# Altium PCB Main Board.PcbDoc
Units mil, origin at the board's own origin, x right, y up, seen from the top; angles counter-clockwise.
Board outline 6000 x 4000 mil, 2 copper layers (Top Layer, Bottom Layer); 13 components, 15 nets, 119 pads, 0 vias.
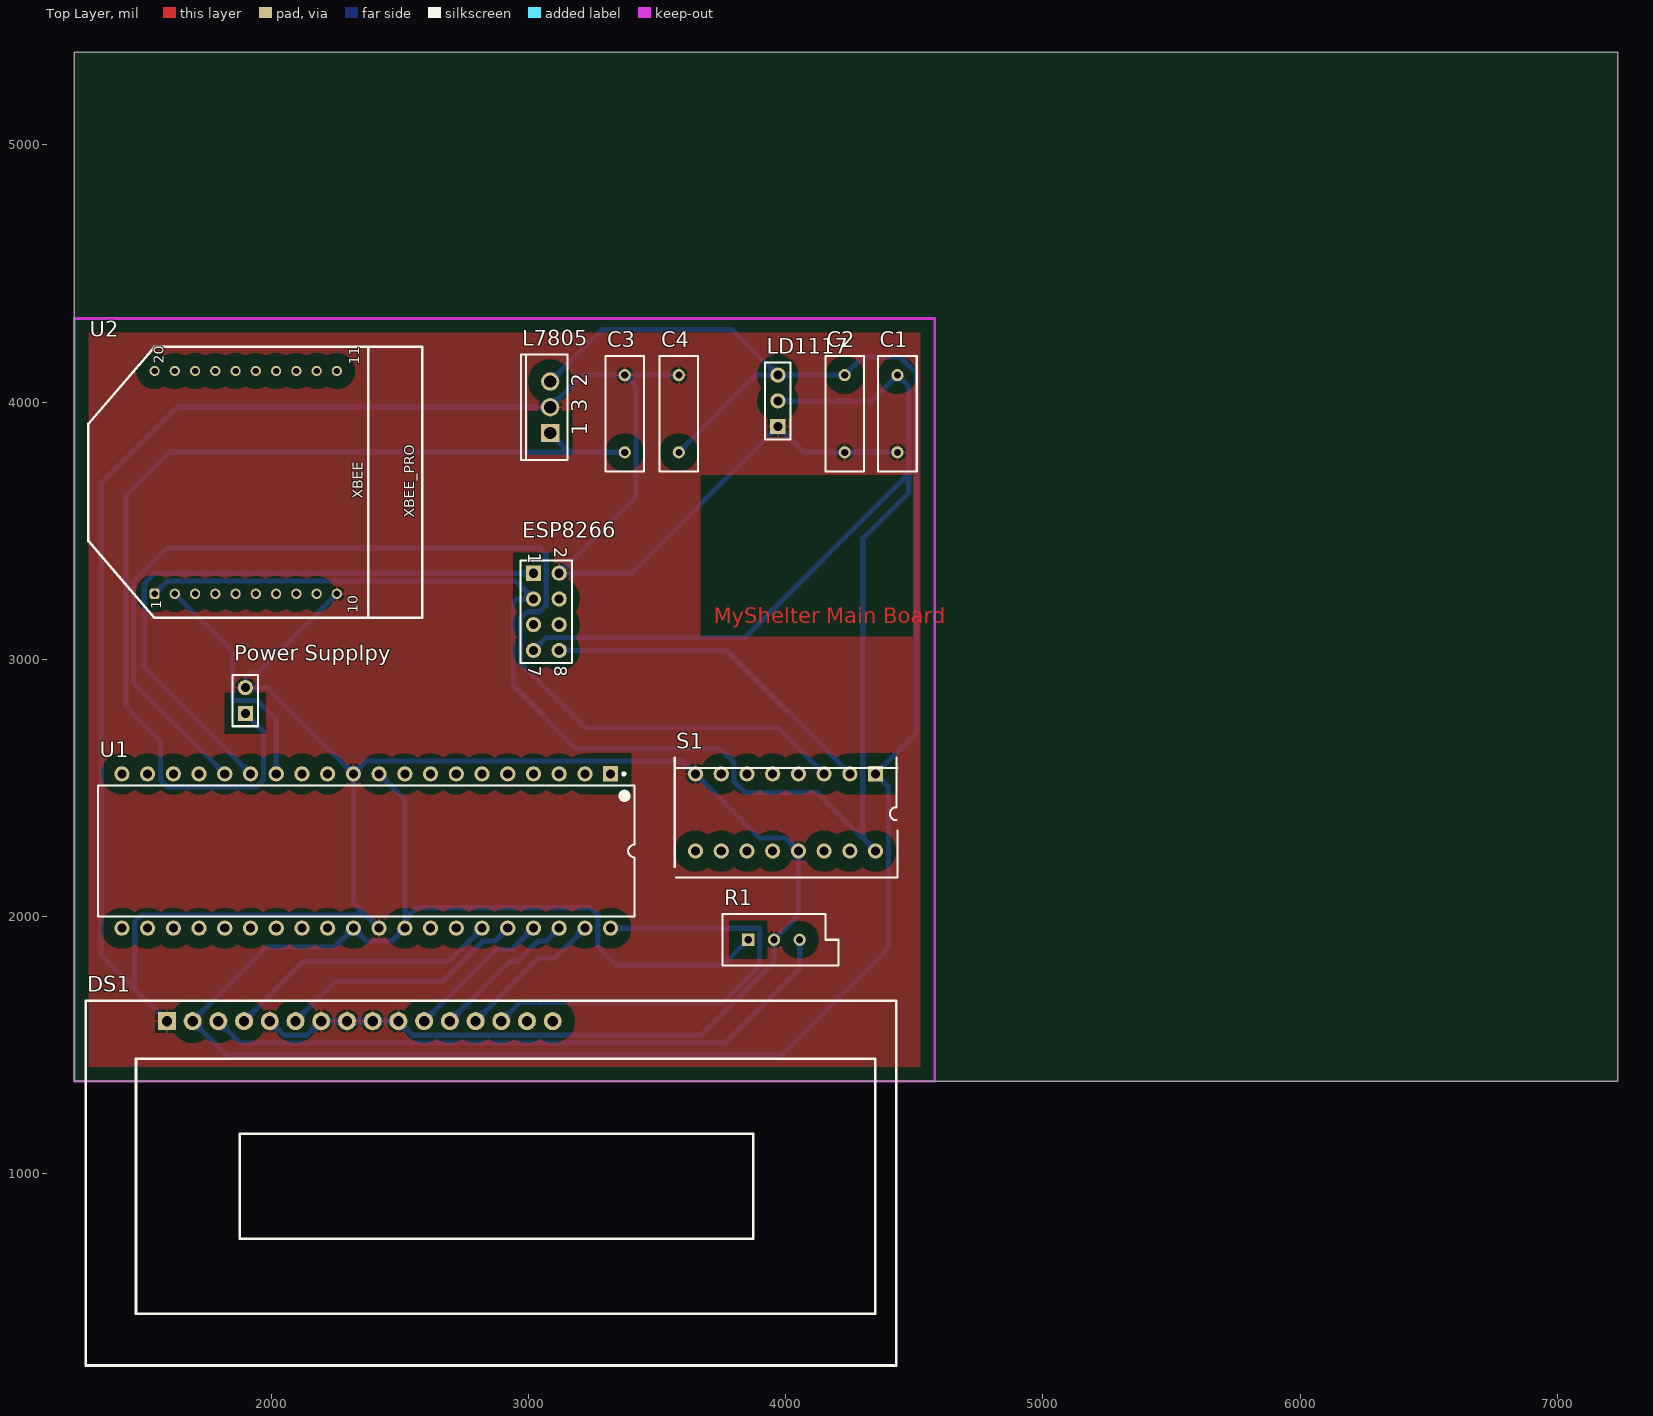
[diagram p0: Top Layer view]
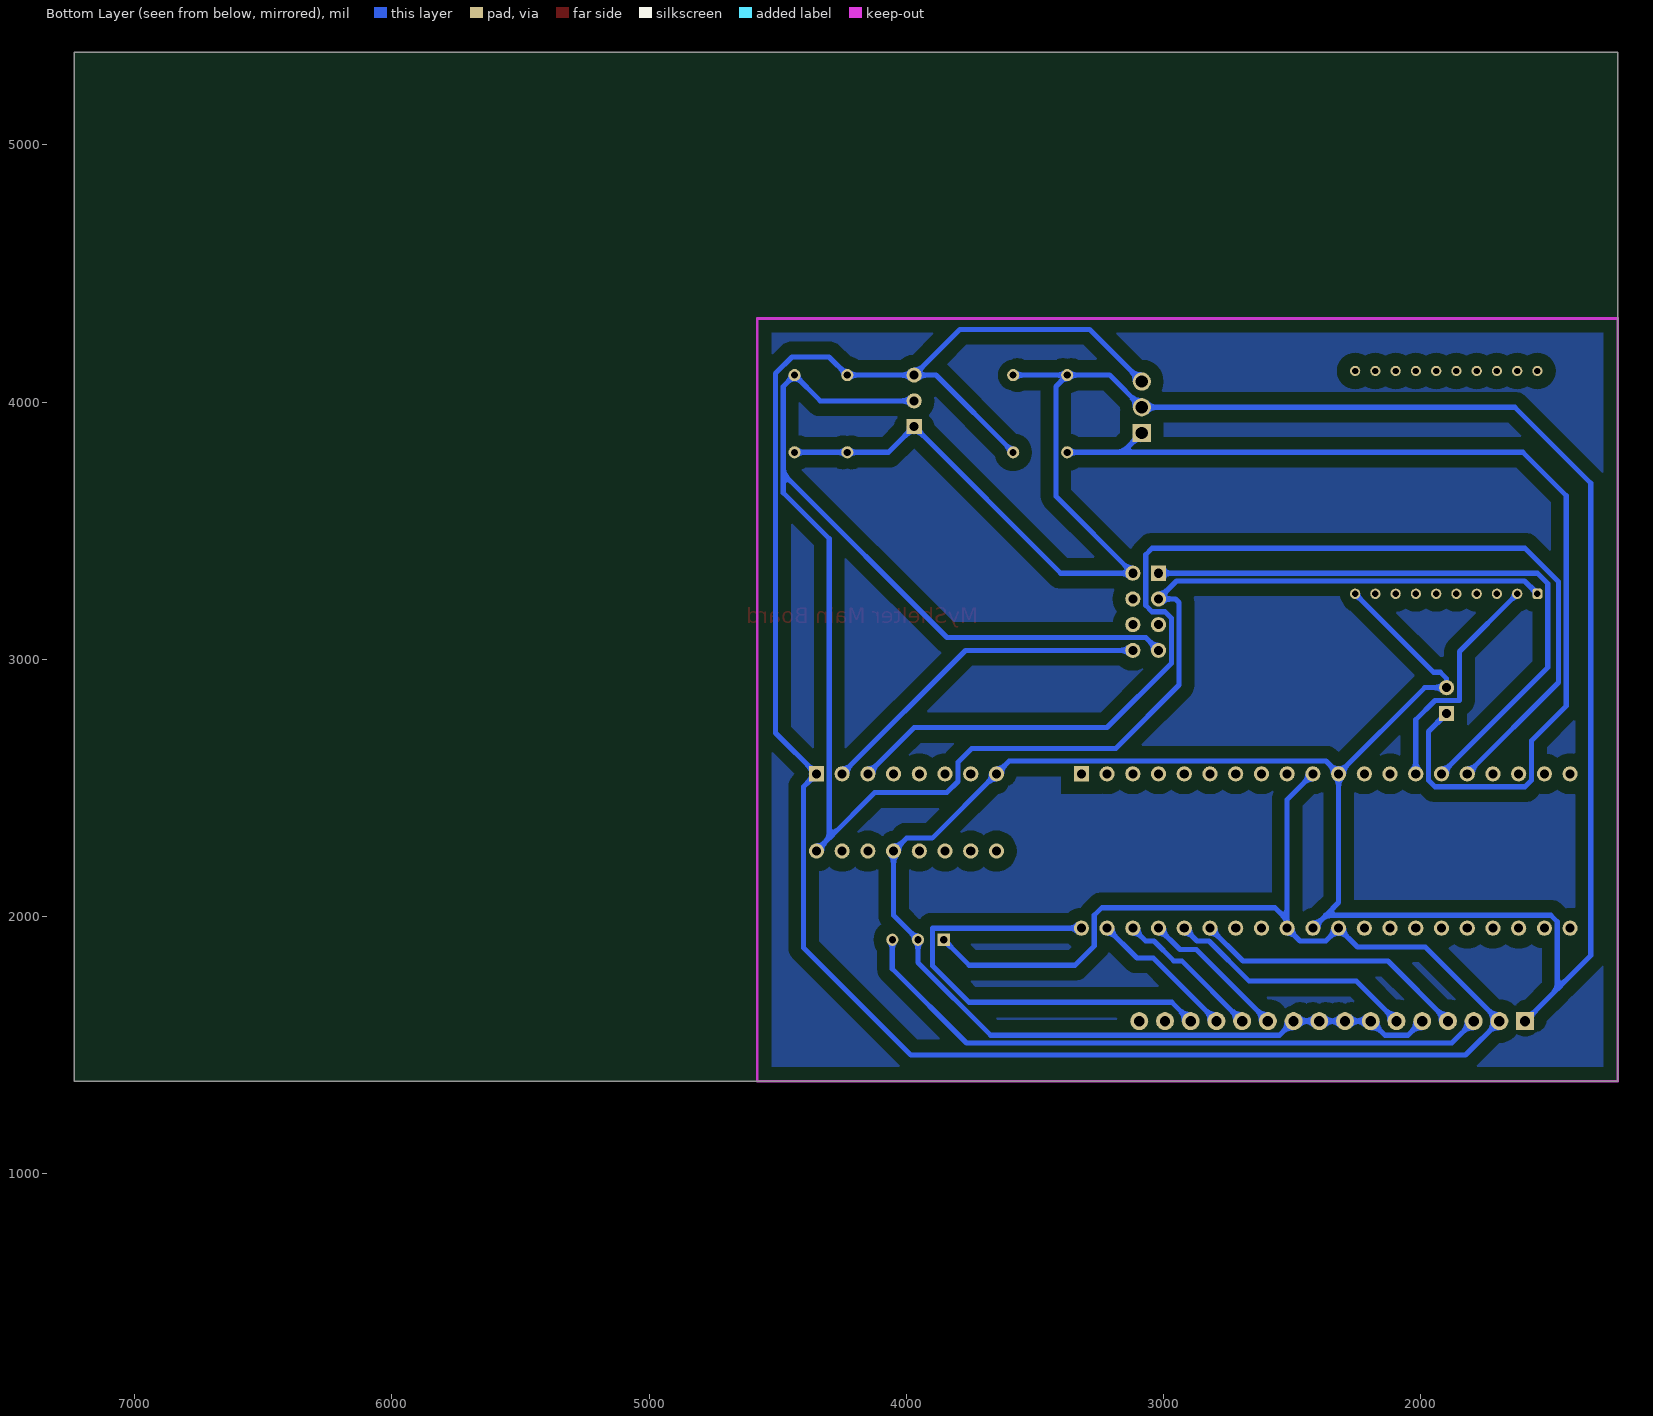
[diagram p1: Bottom Layer view, seen from below]

## Layer stack, top to bottom
Top Solder: solder mask 0.4, Solder Resist, Dk 3.5
Top Layer: signal copper 1.4
Dielectric 1: dielectric 12.6, FR-4, Dk 4.8
Bottom Layer: signal copper 1.4
Bottom Solder: solder mask 0.4, Solder Resist, Dk 3.5

## Board outline
1235,1360 7235,1360 7235,5360 1235,5360

## Design rules (kind name [scope] priority, off if disabled: settings)
Clearance "PolyGon Pour Clearance" [InPolyGon] p1: gap=50
Clearance [All] p2: gap=10
PolygonConnect [All] p1: connectstyle=Relief reliefconductorwidth=10 reliefentries=4 polygonreliefangle="90 Angle" airgapwidth=10
RoutingLayers [All] p1: top layer_v5=FALSE bottom layer_v5=TRUE
RoutingVias [All] p1: holewidth=28 width=50 viastyle="Through Hole" minholewidth=28 minwidth=50 maxholewidth=28 maxwidth=50
SolderMaskExpansion [All] p1: expansion=4
Width [All] p1: maxlimit=20 minlimit=20 preferedwidth=20
29 further rules are at their usual default settings.

## Components (designator, comment, footprint, x,y, rotation, side; value= is the part's Value field where it differs from the comment)
C1 "Cap" RAD-0.3 4435,3955 r90 top
C2 "Cap" RAD-0.3 4230,3955 r270 top
C3 "Cap" RAD-0.3 3375,3955 r270 top
C4 "Cap" RAD-0.3 3585,3955 r270 top
DS1 "LCD 44780" "OLED 16x2" 1595,1593.58 r0 top
ESP8266 "Header 4X2" HDR2X4 3025,3295 r270 top
L7805 "L7805CP" ISOWATT220AB 3085,3980 r90 top
LD1117 "Header 3" HDR1X3 3970,3905 r90 top
"Power Supplpy" "Header 2" HDR1X2 1900,2790 r90 top
R1 "RPot" VR5 3955,1910 r0 top
S1 "ESP8266" DIP-16-KEY 4350,2555 r180 top
U1 "ATmega644PA-PU" 40P6 2370,2255 r270 top
U2 "XBEE" XBEE/PRO 1115,3220 r90 top

## Footprints (in the part's own frame and the unit in brackets; to place one, negate y for a bottom-side part, rotate by r counter-clockwise, add the part's x,y. Pads: shape width x height; smd on the part's side, far side on the other; paste and mask are expansions set on the pad)
40P6 [mm] "40-Pin Ceramic Dual In-Line Package (CerDIP)"
  rect 1.5x1.5 hole 0.9: 1(-7.62,24.13)
  round 1.5 hole 0.9: 2(-7.62,21.59) 3(-7.62,19.05) 4(-7.62,16.51) 5(-7.62,13.97) 6(-7.62,11.43) 7(-7.62,8.89) 8(-7.62,6.35) 9(-7.62,3.81) 10(-7.62,1.27) 11(-7.62,-1.27) 12(-7.62,-3.81) 13(-7.62,-6.35) 14(-7.62,-8.89) 15(-7.62,-11.43) 16(-7.62,-13.97) 17(-7.62,-16.51) 18(-7.62,-19.05) 19(-7.62,-21.59) 20(-7.62,-24.13) 21(7.62,-24.13) 22(7.62,-21.59) 23(7.62,-19.05) 24(7.62,-16.51) 25(7.62,-13.97) 26(7.62,-11.43) 27(7.62,-8.89) 28(7.62,-6.35) 29(7.62,-3.81) 30(7.62,-1.27) 31(7.62,1.27) 32(7.62,3.81) 33(7.62,6.35) 34(7.62,8.89) 35(7.62,11.43) 36(7.62,13.97) 37(7.62,16.51) 38(7.62,19.05) 39(7.62,21.59) 40(7.62,24.13)
  silkscreen extent -7.74,-26.5 6.45,26.5, body extent -7.05,-26.47 7.05,26.47, height 4.83
DIP-16-KEY [mm] "DIP; 16 Leads; Row Spacing 7.62 mm; Pitch 2.54 mm"
  rect 1.5x1.5 hole 0.9: 1(0,0)
  round 1.5 hole 0.9: 2(2.54,0) 3(5.08,0) 4(7.62,0) 5(10.16,0) 6(12.7,0) 7(15.24,0) 8(17.78,0) 9(17.78,7.62) 10(15.24,7.62) 11(12.7,7.62) 12(10.16,7.62) 13(7.62,7.62) 14(5.08,7.62) 15(2.54,7.62) 16(0,7.62)
  silkscreen extent -2.18,-1.59 19.83,10.22
HDR1X2 [mm] "Connector; Header; 2 Position"
  rect 1.5x1.5 hole 0.9: 1(0,0)
  round 1.5 hole 0.9: 2(2.54,0)
  silkscreen extent -1.27,-1.27 3.81,1.27
HDR1X3 [mm] "Connector; Header; 3 Position"
  rect 1.5x1.5 hole 0.9: 1(0,0)
  round 1.5 hole 0.9: 2(2.54,0) 3(5.08,0)
  silkscreen extent -1.27,-1.27 6.35,1.27
HDR2X4 [mm] "Connector; Header; 4x2 Position"
  rect 1.5x1.5 hole 0.9: 1(-1.016,-0.127)
  round 1.5 hole 0.9: 2(-1.016,2.413) 3(1.524,-0.127) 4(1.524,2.413) 5(4.064,-0.127) 6(4.064,2.413) 7(6.604,-0.127) 8(6.604,2.413)
  silkscreen extent -2.29,-1.4 7.87,3.68
ISOWATT220AB [mm] "TO, Thru-Hole, Vertical, Heatsink Mounted; 3 In-Line Leads; Pitch 2.54 mm; Pin sequence 1, 3, 2"
  rect 1.8x1.8 hole 1.2: 1(-2.54,0)
  round 1.8 hole 1.2: 2(2.54,0) 3(0,0)
  silkscreen extent -5.2,-1.7 5.2,2.9
"OLED 16x2" [mil]
  rect 70x70 hole 40: 1(0,0)
  round 70 hole 40: 2(100,0) 3(200,0) 4(300,0) 5(400,0) 6(500,0) 7(600,0) 8(700,0) 9(800,0) 10(900,0) 11(1000,0) 12(1100,0) 13(1200,0) 14(1300,0) 15(1400,0) 16(1500,0)
  silkscreen extent -315,-1339 2835,79
RAD-0.3 [mm] "Radial Cap, Thru-Hole; 2 Leads; 0.3 in Pin Spacing"
  round 1.2 hole 0.7: 1(-3.81,0) 2(3.81,0)
  silkscreen extent -5.71,-1.91 5.71,1.91
VR5 [mm] "Thru-Hole; 3 Leads"
  rect 1.2x1.2 hole 0.7: 1(-2.54,0)
  round 1.2 hole 0.7: 2(0,0) 3(2.54,0)
  silkscreen extent -5.08,-2.54 6.35,2.54
XBEE/PRO [mil]
  rrect50% 40x40 hole 25: 1(35,-432.09)
  round 40 hole 25: 2(35,-510.83) 3(35,-589.57) 4(35,-668.31) 5(35,-747.05) 6(35,-825.79) 7(35,-904.53) 8(35,-983.27) 9(35,-1062.01) 10(35,-1140.75) 11(901.14,-1140.75) 12(901.14,-1062.01) 13(901.14,-983.27) 14(901.14,-904.53) 15(901.14,-825.79) 16(901.14,-747.05) 17(901.14,-668.31) 18(901.14,-589.57) 19(901.14,-510.83) 20(901.14,-432.09)
  silkscreen extent -59,-1472 995,-175

## Part data
C1 C2 C3 C4: "Capacitor"
ESP8266: "Header, 4-Pin, Dual row"
L7805: "Positive Voltage Regulator"
LD1117: "Header, 3-Pin"
"Power Supplpy": "Header, 2-Pin"
R1: "Potentiometer"
S1: library part SW-DIP8, "4009 Series DIP Switch, Raised actuator"
U1: "8-bit AVR Microcontroller, 64KB Flash, 2KB EEPROM, 4KB SRAM, 40-pin PDIP, Industrial Grade (-40°C to 85°C)"

## Nets (pads, with @x,y where several pads share a name; then routed paths per layer and width w, separated by ;. In a path a pad name is that pad's centre, name@x,y a point inside that pad or via, vN(x,y) a via of type N, cw(c..) or ccw(c..) an arc to the next point about the centre after c; other vN are vias at no path point)
3.3V: C1.2 ESP8266.3 ESP8266.7 LD1117.2 S1.16 U2.1 | length 7792.9
  Bottom Layer w20: U2.1 1597.09,3305 2950,3305 ESP8266.3 2954,3235 2940,3221 2940,2900 3186,2654 3746,2654 3800,2600 3800,2525 3843,2482 4123,2482 4300,2305 ; ESP8266.7 3070,3085 3842,3085 4479,3722 ; LD1117.2 4335,4005 C1.2 4479,4061 4479,3722 ; S1.16 4300,2305 ; 4300,2305 4300,3469 4479,3648 4479,3722
GND: "Power Supplpy.2" C1.1 C2.2 C3.1 C4.1 DS1.1 DS1.5 DS1.7 DS1.8 DS1.9 DS1.10 ESP8266.2 L7805.3 LD1117.1 R1.2 S1.8 S1.13 U1.11 U1.31 U2.10 | length 14534
  Bottom Layer w20: DS1.1 1470,1718.58 ; DS1.5 2050,1538.58 2140,1538.58 DS1.7 DS1.8 DS1.9 DS1.10 2550,1538.58 3672.58,1538.58 3955,1821 R1.2 4050,2005 S1.13 4000,2305 3900,2305 S1.8 3600.47,2604.53 2369.53,2604.53 U1.11 ; U2.10 1950.75,2950 1925,2950 1900,2925 1900,2890 1985,2890 U1.11 ; U1.31 2370,2005 ; C4.1 C3.1 ; C1.1 C2.2 4070,3805 LD1117.1 3400,3335 ESP8266.2 3419,3634 3419,4061 C3.1 ; 1470,1718.58 1340,1848.58 1340,3685 1635,3980 L7805.3 3210,4105 C3.1 ; 1470,1718.58 1470,1980 1495,2005 2370,2005 ; U1.11 2320,2055 2370,2005
NetDS1_3: DS1.3 R1.3 | length 2527.7
  Bottom Layer w20: DS1.3 1880,1508.58 3766.58,1508.58 4055,1797 R1.3
PA0: DS1.14 U1.40 | length 1818.2
  Bottom Layer w20: DS1.14 2968.42,1667 3757,1667 3899,1809 3899,1955 U1.40
PA1: DS1.13 U1.39 | length 574.7
  Bottom Layer w20: DS1.13 3040.64,1839.22 3104.22,1839.22 U1.39
PA2: DS1.12 U1.38 | length 574.7
  Bottom Layer w20: DS1.12 2929.42,1828 2961,1828 3038,1905 3070,1905 U1.38
PA3: DS1.11 U1.37 | length 574.7
  Bottom Layer w20: DS1.11 2873.42,1872 2937,1872 U1.37
PA4: DS1.6 U1.36 | length 974.7
  Bottom Layer w20: DS1.6 2250.42,1749 2667.38,1749 2823.38,1905 2870,1905 U1.36
PA5: DS1.4 U1.35 | length 1074.7
  Bottom Layer w20: DS1.4 2128.42,1827 2692,1827 U1.35
RXD0: U1.14 U2.2 | length 918.9
  Bottom Layer w20: U2.2 1850,3030.83 1850,2840 1945,2840 2020,2765 U1.14
RXD1: ESP8266.1 U1.15 | length 2440.6
  Bottom Layer w20: U1.15 1507,2968 1507,3295 1547,3335 ESP8266.1
TXD1: S1.3 U1.16 | length 4414.1
  Bottom Layer w20: U1.16 1465,2910 1465,3302 1595,3432 3045,3432 3070,3407 3070,3210 3045,3185 2995,3185 2970,3160 2970,2985 3220,2735 3970,2735 S1.3
TXD1OUT: ESP8266.8 S1.2 | length 1328.8
  Bottom Layer w20: ESP8266.8 3770,3035 S1.2
VCC: C2.1 C4.2 DS1.2 L7805.2 LD1117.3 R1.1 S1.1 U1.10 U1.30 U1.32 | length 10614.4
  Bottom Layer w20: U1.10 2520,2455 2520,1986.74 ; L7805.2 3288,4283 3792,4283 LD1117.3 ; C4.2 3885,4105 LD1117.3 ; R1.1 3756,1811 3345,1811 3270,1886 3270,2005 3240.47,2034.53 2567.79,2034.53 2520,1986.74 ; 2520,1986.74 U1.32 2470,1905 2370,1905 U1.30 2247,1882 1983.42,1882 DS1.2 1826.58,1462 3983,1462 4400,1879 4400,2505 S1.1 4509,2714 4509,4112 4445,4176 4301,4176 C2.1 LD1117.3
VIN: "Power Supplpy.1" C3.2 L7805.1 | length 3987.7
  Bottom Layer w20: 1900,2790 1970,2720 1970,2530 1945,2505 1595,2505 1570,2530 1570,2684 1435,2819 1435,3636 1604,3805 3160,3805 ; L7805.1 3160,3805 ; C3.2 3160,3805
pads on no net: DS1.15 DS1.16 ESP8266.4 ESP8266.5 ESP8266.6 S1.4 S1.5 S1.6 S1.7 S1.9 S1.10 S1.11 S1.12 S1.14 S1.15 U1.1 U1.2 U1.3 U1.4 U1.5 U1.6 U1.7 U1.8 U1.9 U1.12 U1.13 U1.17 U1.18 U1.19 U1.20 U1.21 U1.22 U1.23 U1.24 U1.25 U1.26 U1.27 U1.28 U1.29 U1.33 U1.34 U2.3 U2.4 U2.5 U2.6 U2.7 U2.8 U2.9 U2.11 U2.12 U2.13 U2.14 U2.15 U2.16 U2.17 U2.18 U2.19 U2.20

## Polygon pours and split planes (outlines as drawn)
GND on Top Layer "Bottom Layer-No Net" (solid, pour order 0): 1235,1360 1235,4325 4580,4325 4580,1360 1235,1360
GND on Bottom Layer "Bottom Layer-No Net" (solid, pour order 2): 1235,1360 1235,4325 4580,4325 4580,1360 1235,1360

## Keep-outs
Keep-Out Layer:
  lines w10: 1235,1360 4580,1360 4580,4325 1235,4325 1235,1360

## Other copper
Top Layer:
  text "MyShelter Main Board" at 3720,3140 h60

## Text inside footprints (layer, text, board x,y; h text height)
ESP8266: Top Overlay "2" at 3100,3435 h50 r270; Top Overlay "1" at 3000,3415 h50 r270; Top Overlay "7" at 3000,2975 h50 r270; Top Overlay "8" at 3100,2975 h50 r270
L7805: Top Overlay "1" at 3229.68,3870.16 h59.06 r90; Top Overlay "2" at 3229.68,4060.32 h59.06 r90; Top Overlay "3" at 3229.68,3960.32 h59.06 r90
U2: Top Overlay "XBEE_PRO" at 2557.09,3550 h40 r90; Top Overlay "1" at 1572.09,3195 h40 r90; Top Overlay "10" at 2337.09,3180 h40 r90; Top Overlay "11" at 2342.09,4145 h40 r90; Top Overlay "20" at 1582.09,4150 h40 r90